# EAGLE board PCB-ARD-XTD1 (EAGLE 6.4)
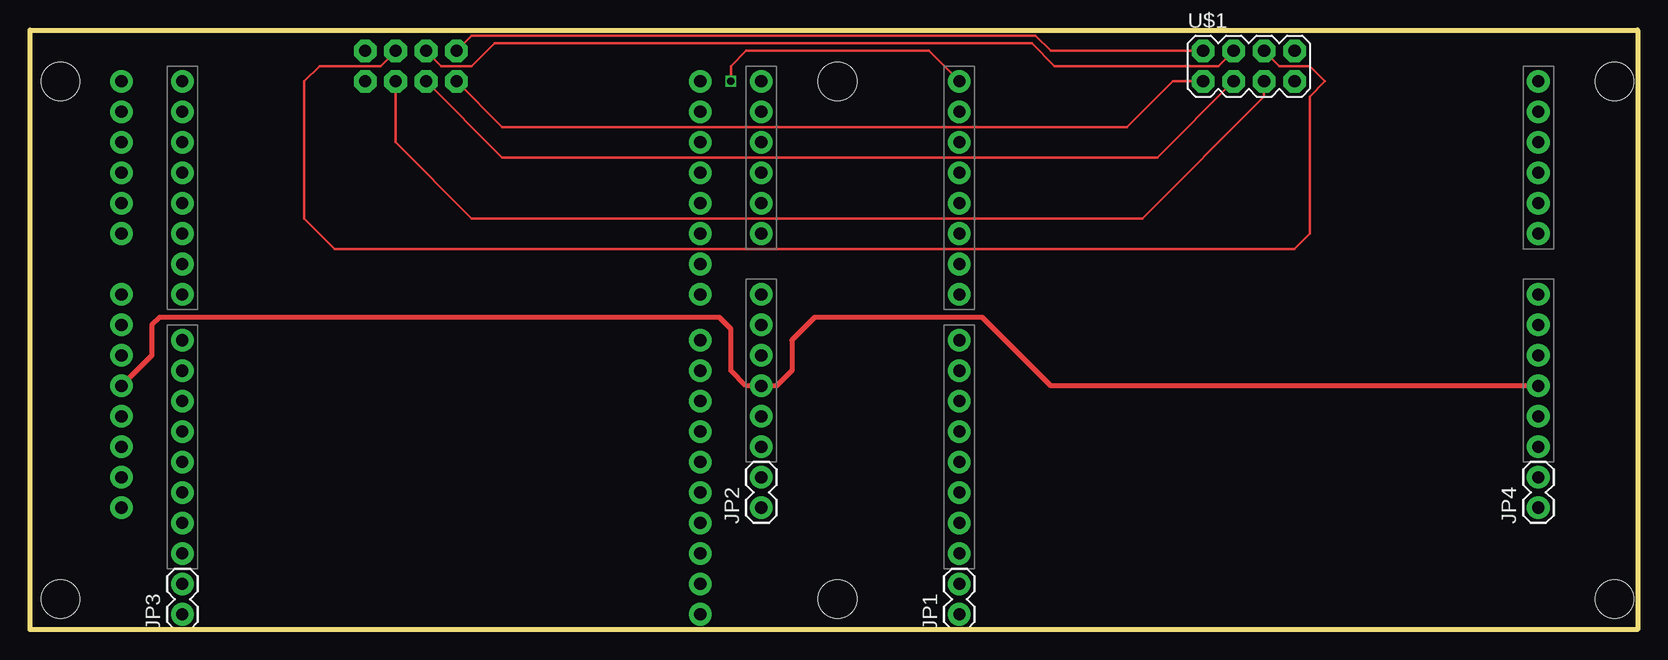
[diagram p0: board, top side]
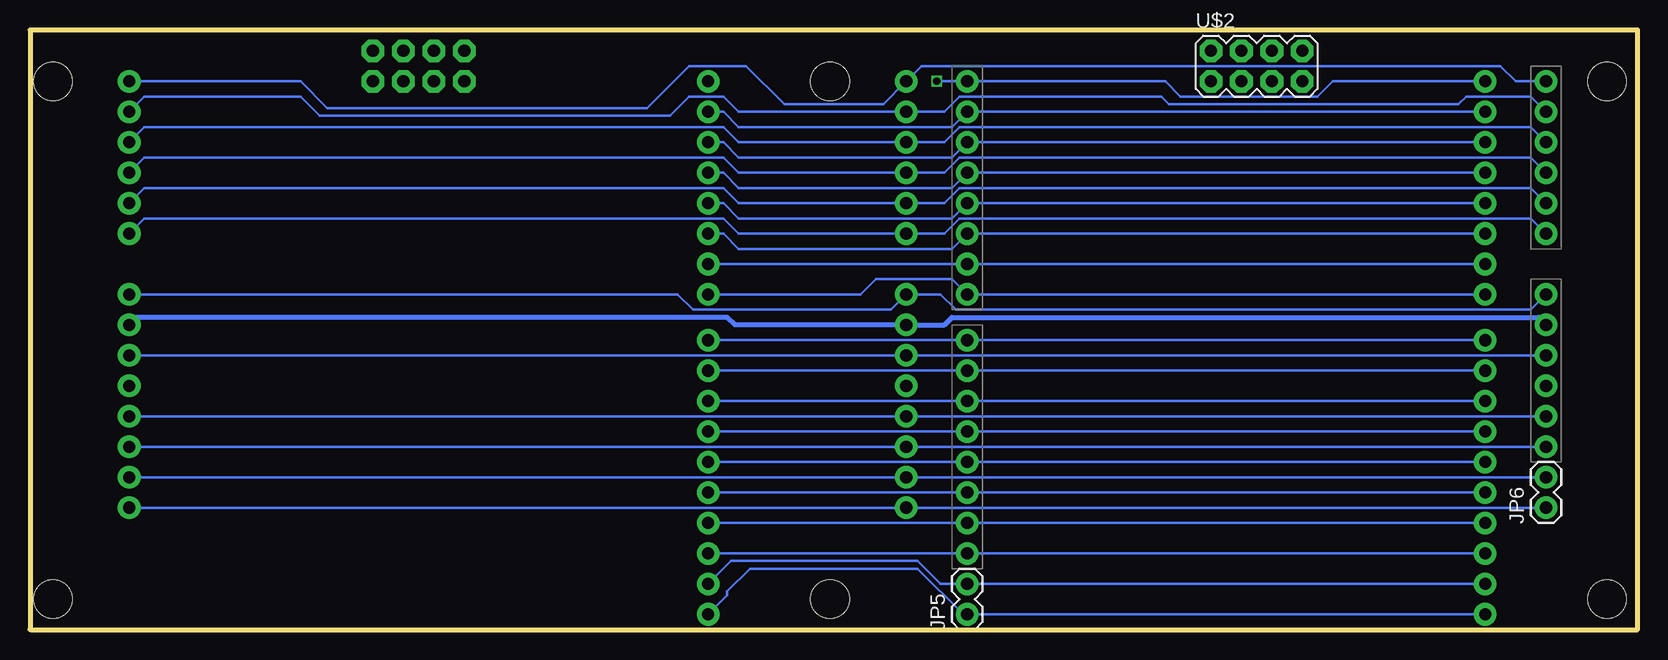
[diagram p1: board, bottom side, seen from below]

Size 134 x 50 mm. Coordinates in mm from the lower left corner, seen from the top.
Outline: 0,0 0,50 134,50 134,0 0,0
Copper layers (1*16): Top 0.035mm / dielectric 1.5mm / Bottom 0.035mm
Design rules "Fusion_eagle_rule_v1.1": minimum track width 6mil, minimum drill 12mil, track to track 6mil, track to pad 6mil, pad to pad 6mil, via to via 6mil, smd to smd 0mil, copper to edge 10mil, drill to drill 10mil, minimum pad ring 10mil, minimum via ring 6mil, stop-mask expansion 2mil, vias tented up to drill 100mil, thermal gap 10mil
Net classes: 0 default: width 0.203 mm, drill 0.406 mm, clearance 0.203 mm; 1 Power: width 0.406 mm, drill 0.61 mm, clearance 0.406 mm
Holes 3.2 mm at 2.54,2.54 2.54,45.72 132.08,2.54 132.08,45.72 67.31,45.72 67.31,2.54

## Footprints (pad centres in the part's own frame; a part is rotated, then mirrored left to right if it is on the bottom)
1X02 = drill 1.016 pad 1.88: 1 0,0; 2 2.54,0
DUEMILANOVE_VIAS = drill 1.016 pad 1.88: 3.3V 50.8,13.97; 5V 50.8,16.51; A0 50.8,29.21; A1 50.8,31.75; A2 50.8,34.29; A3 50.8,36.83; A4 50.8,39.37; A5 50.8,41.91; AREF 2.54,2.54; D2 2.54,36.83; D3 2.54,34.29; D4 2.54,31.75; D5 2.54,29.21; D6 2.54,26.67; D7 2.54,24.13; D8 2.54,20.32; D9 2.54,17.78; D10 2.54,15.24; D11 2.54,12.7; D12 2.54,10.16; D13 2.54,7.62; GND@0 50.8,19.05; GND@1 50.8,21.59; GND@2 2.54,5.08; RES 50.8,11.43; RX 2.54,41.91; TX 2.54,39.37; VIN 50.8,24.13
2X4 = drill 1.016 pad 1.88 octagon: 1 -3.81,-1.27; 2 -3.81,1.27; 3 -1.27,-1.27; 4 -1.27,1.27; 5 1.27,-1.27; 6 1.27,1.27; 7 3.81,-1.27; 8 3.81,1.27

## Placement (x,y rotation side)
JP1  [1X02]  77.47,1.27 90 top
JP2  [1X02]  60.96,10.16 90 top
JP3  [1X02]  12.7,1.27 90 top
JP4  [1X02]  125.73,10.16 90 top
JP5  [1X02]  55.88,1.27 90 bottom
JP6  [1X02]  7.62,10.16 90 bottom
U1  ARDUINO_SHIELDNO_SILK  [DUEMILANOVE_VIAS]  74.93,3.81 0 top
U2  ARDUINO_SHIELDNO_SILK  [DUEMILANOVE_VIAS]  10.16,3.81 0 top
U3  ARDUINO_SHIELDNO_SILK  [DUEMILANOVE_VIAS]  58.42,3.81 0 bottom
U$1  M04X2  [2X4]  101.6,46.99 0 top
U$2  M04X2  [2X4]  31.75,46.99 0 bottom

## Library data of the parts
JP1-JP6 U1-U3 U$1 U$2 = SparkFun

## Nets
F1: U1.RX U2.RX U3.RX
F2: U1.TX U2.TX U3.TX
F3: U1.D2 U2.D2 U3.D2
F4: U1.D3 U2.D3 U3.D3
F5: U1.D4 U2.D4 U3.D4
F6: U1.D5 U2.D5 U3.D5
F7: U1.D6 U2.D6 U3.D6
F8: U1.D7 U2.D7 U3.D7
F9: U1.D8 U2.D8 U3.D8
F10: U1.D9 U2.D9 U3.D9
F11: U1.D10 U2.D10 U3.D10
F12: U1.D11 U2.D11 U3.D11
F13: U1.D12 U2.D12 U3.D12
F14: U1.D13 U2.D13 U3.D13
F15: U1.A0 U2.A0 U3.A0
F16: U1.A1 U2.A1 U3.A1
F17: U1.A2 U2.A2 U3.A2
F18: U1.A3 U2.A3 U3.A3
F19: U1.A4 U2.A4 U3.A4
F20: U1.A5 U2.A5 U3.A5
F21: U1.RES U2.RES U3.RES
F22 [Power]: U1.VIN U2.VIN U3.VIN
F23 [Power]: U1.5V U2.5V U3.5V
F24 [Power]: U1.3.3V U2.3.3V U3.3.3V
F25: U1.AREF U2.AREF U3.AREF
F26 [Power]: U1.GND@2 U2.GND@2 U3.GND@2
F27 [Power]: U1.GND@1 U2.GND@1 U3.GND@1
F28 [Power]: U1.GND@0 U2.GND@0 U3.GND@0
F29: JP1.2 JP3.2 JP5.2
F30: JP1.1 JP3.1 JP5.1
F31: U$1.1 U$2.1
F32: U$1.3 U$2.3
F33: U$1.5 U$2.5
F35: U$1.2 U$2.2
F36: U$1.4 U$2.4
F37: U$1.6 U$2.6
F39: JP2.2 JP4.2 JP6.2
F40: JP2.1 JP4.1 JP6.1

## Tracks (layer width: path | path; a pad name or v marks a point on that pad's centre or on a via)
F1  (via drill 0.6)
  Top 0.203: v58.42,45.72 58.42,46.99 59.69,48.26 74.93,48.26 U1.RX
  Bottom 0.203: U2.RX 25.4,45.72 26.67,44.45 38.1,44.45 39.37,45.72 U3.RX v58.42,45.72
F2
  Bottom 0.203: U1.TX 76.2,43.18 74.93,41.91 57.15,41.91 U3.TX U2.TX
F3
  Bottom 0.203: U1.D2 76.2,40.64 74.93,39.37 57.15,39.37 U3.D2 U2.D2
F4
  Bottom 0.203: U1.D3 76.2,38.1 74.93,36.83 57.15,36.83 U3.D3 U2.D3
F5
  Bottom 0.203: U1.D4 76.2,35.56 74.93,34.29 57.15,34.29 U3.D4 U2.D4
F6
  Bottom 0.203: U1.D5 76.2,33.02 74.93,31.75 57.15,31.75 U3.D5 U2.D5
F7
  Bottom 0.203: U1.D6 U3.D6 U2.D6
F8
  Bottom 0.203: U1.D7 64.77,27.94 63.5,29.21 57.15,29.21 U3.D7 U2.D7
F9
  Bottom 0.203: U1.D8 U3.D8 U2.D8
F10
  Bottom 0.203: U1.D9 U3.D9 U2.D9
F11
  Bottom 0.203: U1.D10 U3.D10 U2.D10
F12
  Bottom 0.203: U1.D11 U3.D11 U2.D11
F13
  Bottom 0.203: U1.D12 U3.D12 U2.D12
F14
  Bottom 0.203: U1.D13 U3.D13 U2.D13
F15
  Bottom 0.203: U1.A0 124.46,34.29 76.2,34.29 74.93,33.02 U2.A0 57.78,33.02 56.52,34.29 8.89,34.29 U3.A0
F16
  Bottom 0.203: U1.A1 124.46,36.83 76.2,36.83 74.93,35.56 U2.A1 57.78,35.56 56.52,36.83 8.89,36.83 U3.A1
F17
  Bottom 0.203: U1.A2 124.46,39.37 76.2,39.37 74.93,38.1 U2.A2 57.78,38.1 56.52,39.37 8.89,39.37 U3.A2
F18
  Bottom 0.203: U1.A3 124.46,41.91 76.2,41.91 74.93,40.64 U2.A3 57.78,40.64 56.52,41.91 8.89,41.91 U3.A3
F19
  Bottom 0.203: U1.A4 124.46,44.45 111.44,44.45 109.86,42.86 80.64,42.86 79.06,44.45 76.2,44.45 74.93,43.18 U2.A4 57.78,43.18 56.52,44.45 39.69,44.45 39.05,43.81 14.92,43.81 14.29,44.45 8.89,44.45 U3.A4
F20
  Bottom 0.203: U1.A5 111.44,45.72 109.22,43.5 82.55,43.5 79.06,46.99 74.3,46.99 71.12,43.81 62.87,43.81 U2.A5 59.69,46.99 11.43,46.99 10.16,45.72 U3.A5
F21
  Bottom 0.203: U1.RES U2.RES U3.RES
F22
  Bottom 0.203: U1.VIN 80.01,27.94 78.74,26.67 62.23,26.67 U2.VIN 58.1,27.94 56.83,26.67 8.89,26.67 U3.VIN
F23
  Top 0.406: U3.5V 10.16,22.86 10.16,25.4 10.79,26.04 57.47,26.04 58.42,25.08 58.42,21.59 59.69,20.32 U2.5V 62.23,20.32 63.5,21.59 63.5,24.13 65.41,26.04 79.38,26.04 85.09,20.32 U1.5V
F24
  Bottom 0.203: U1.3.3V U2.3.3V U3.3.3V
F25
  Bottom 0.203: U1.AREF U3.AREF U2.AREF
F26
  Bottom 0.203: U1.GND@2 U3.GND@2 U2.GND@2
F27
  Bottom 0.406: U3.GND@1 8.26,26.04 57.15,26.04 57.78,25.4 U2.GND@1 75.25,25.4 75.88,26.04 125.09,26.04 U1.GND@1
F28
  Bottom 0.203: U1.GND@0 U2.GND@0 U3.GND@0
F29
  Bottom 0.203: JP3.2 JP5.2 58.1,3.81 60.01,5.71 75.56,5.71 JP1.2
F30
  Bottom 0.203: JP3.1 JP5.1 56.2,1.27 60.01,5.08 73.98,5.08 75.88,3.17 75.88,2.86 JP1.1
F31
  Top 0.203: U$1.1 95.25,45.72 91.44,41.91 39.37,41.91 U$2.1
F32
  Top 0.203: U$2.3 39.37,39.37 93.98,39.37 U$1.3
F33
  Top 0.203: U$1.5 102.87,44.45 92.71,34.29 36.83,34.29 30.48,40.64 U$2.5
F35
  Top 0.203: U$1.2 85.09,48.26 83.82,49.53 36.83,49.53 U$2.2
F36
  Top 0.203: U$1.4 99.06,46.99 85.41,46.99 83.5,48.9 38.73,48.9 36.83,46.99 34.29,46.99 U$2.4
F37
  Top 0.203: U$2.6 29.21,46.99 24.13,46.99 22.86,45.72 22.86,34.29 25.4,31.75 105.41,31.75 106.68,33.02 106.68,44.45 107.95,45.72 106.68,46.99 104.14,46.99 U$1.6
F39
  Bottom 0.203: JP4.2 JP2.2 JP6.2
F40
  Bottom 0.203: JP4.1 JP2.1 JP6.1